# Altium PCB esp_slavev2.PcbDoc
Units mm, origin at the board's own origin, x right, y up, seen from the top; angles counter-clockwise.
Board outline 85.85 x 58.8 mm, 2 copper layers (Top Layer, Bottom Layer); 22 components, 17 nets, 84 pads, 0 vias.
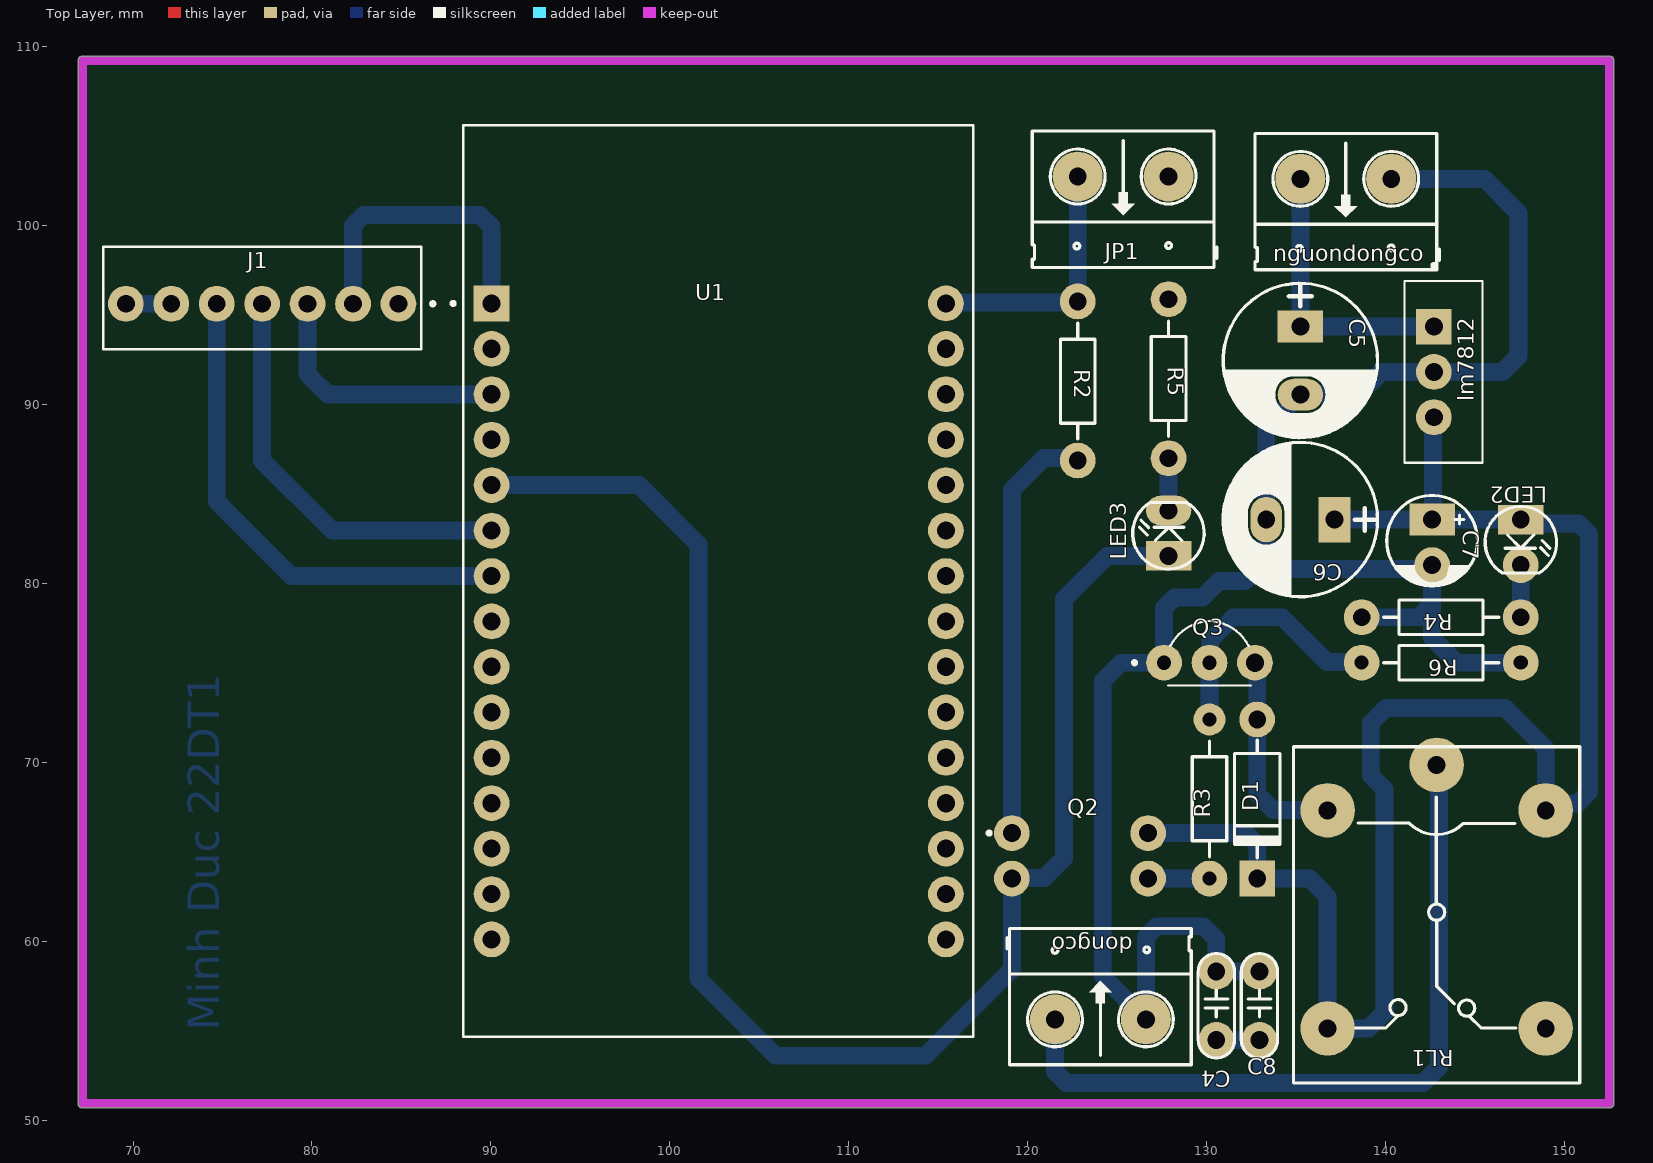
[diagram p0: Top Layer view]
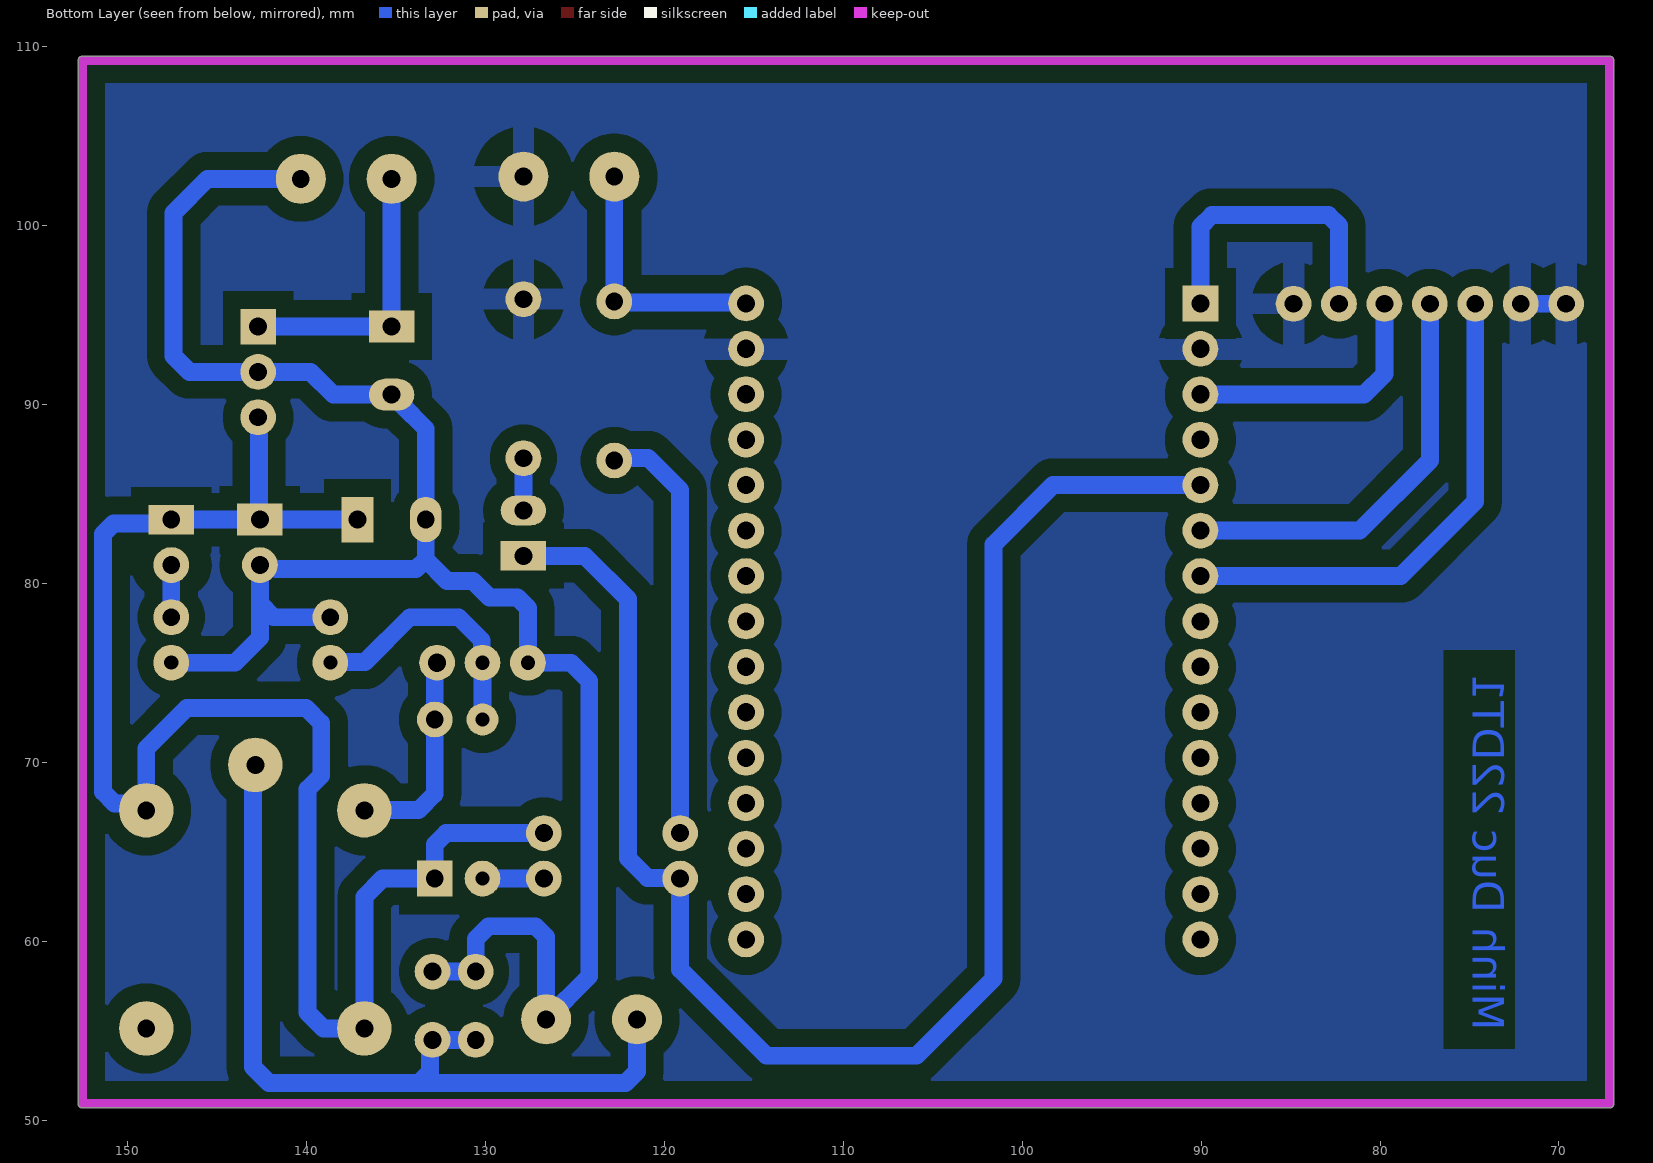
[diagram p1: Bottom Layer view, seen from below]
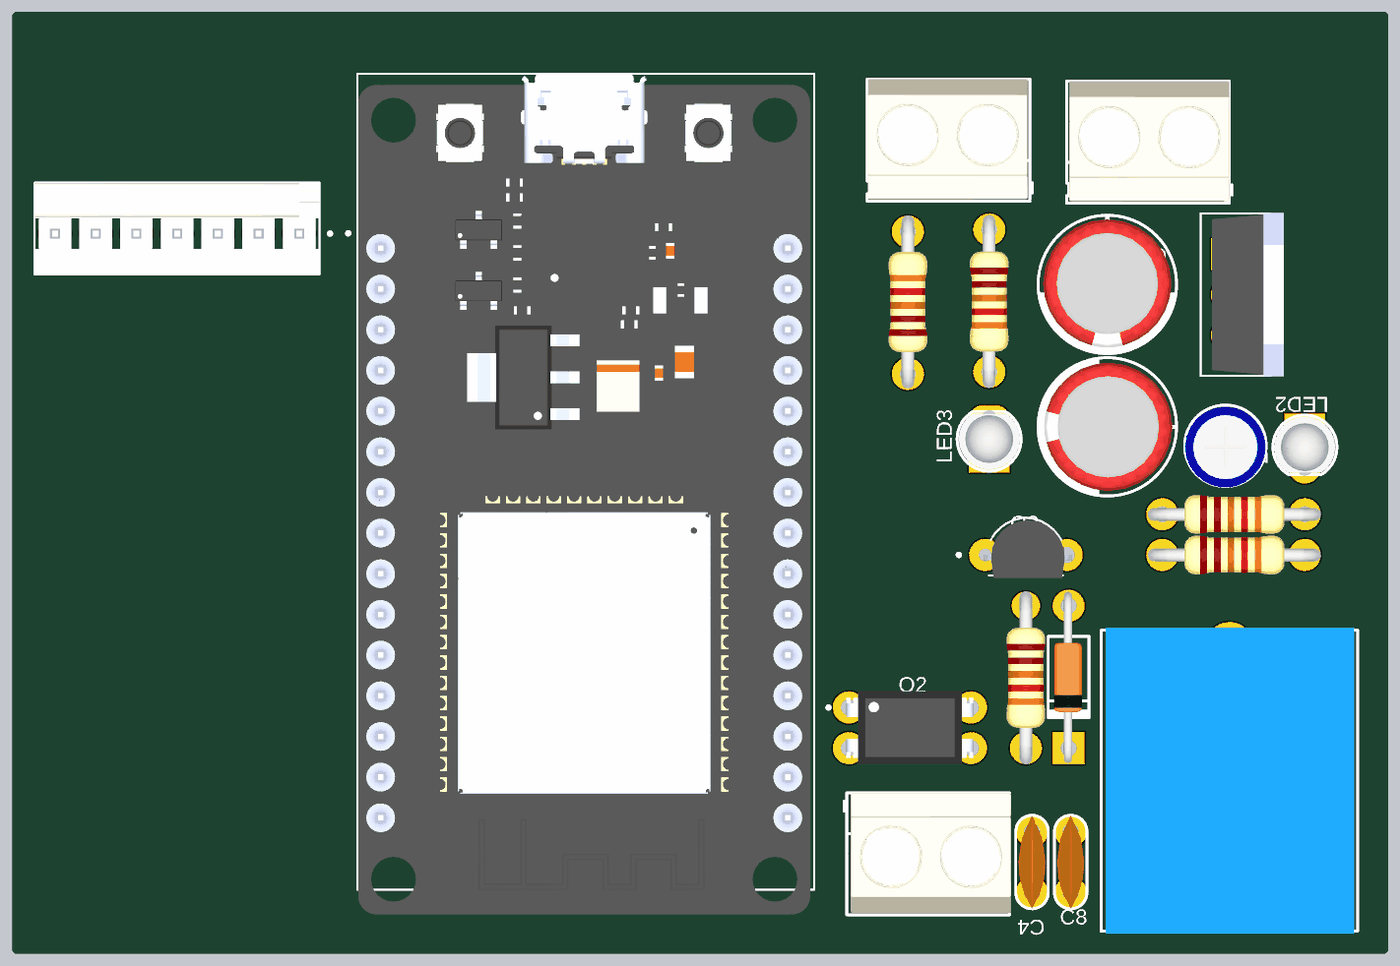
[diagram p2: 3D render of the assembled board from above, using the file's embedded part models]

## Layer stack, top to bottom
Top Solder: solder mask 0.0102, Solder Resist, Dk 3.5
Top Layer: signal copper 0.0356
Dielectric 1: dielectric 0.32, FR-4, Dk 4.8
Bottom Layer: signal copper 0.0356
Bottom Solder: solder mask 0.0102, Solder Resist, Dk 3.5

## Board outline
66.929,50.927 ccw(c67.183,50.927) 67.183,50.673 152.527,50.673 ccw(c152.527,50.927) 152.781,50.927 152.781,109.22 ccw(c152.527,109.22) 152.527,109.474 67.183,109.474 ccw(c67.183,109.22) 66.929,109.22

## Design rules (kind name [scope] priority, off if disabled: settings)
Clearance [All] p1: gap=1 ignorepadtopadclearanceinfootprint=FALSE
PlaneConnect [All] p1: planeconnectstyle=Relief reliefexpansion=0.508 reliefentries=4 reliefconductorwidth=0.3 reliefairgap=0.4
PolygonConnect [All] p1: connectstyle=Relief reliefconductorwidth=1.2 reliefentries=4 polygonreliefangle="90 Angle" airgapwidth=1.4
RoutingVias [All] p1: holewidth=0.711 width=1.27 viastyle="Through Hole" minholewidth=0.711 minwidth=1.27 maxholewidth=0.711 maxwidth=1.27
SolderMaskExpansion [All] p1: expansion=0.102 istentingtop=FALSE
Width [All] p1: maxlimit=1 minlimit=1 preferedwidth=1
29 further rules are at their usual default settings.

## Components (designator, comment, footprint, x,y, rotation, side; value= is the part's Value field where it differs from the comment)
C4 "103" CN1.5 130.556,58.293 r270 top value=0.01uF
C5 "100uF/35V" CP1.5/3.4 135.255,94.361 r270 top value=100uF/35V/50V
C6 "100uF/35V" CP1.5/3.4 137.16,83.566 r180 top value=100uF/35V/50V
C7 "10uF" CP1/2 142.621,83.566 r270 top value=10uF/50V
C8 "103" CN1.5 132.969,58.293 r270 top value=0.01uF
D1 "1N4007" D1A 132.842,72.39 r90 top
dongco "Header 2_1" HED2 121.539,55.626 r0 top value="Header 2"
J1 "640456-7" TE_640456-7 84.836,95.631 r0 top
JP1 "Header 2_1" HED2 127.889,102.743 r180 top value="Header 2"
LED2 "LED" LED-3#1 147.574,83.566 r270 top value="LED 3 ly Single Colour"
LED3 "LED" LED-3#2 127.889,81.534 r90 top value="LED 3 ly Single Colour"
lm7812 "LM7812CT" TO253P1057X470X2040-3 143.256,91.821 r270 top
nguondongco "Header 2_1" HED2 140.335,102.616 r180 top value="Header 2"
Q2 "PC817-B" DIP762W50P254L650H455Q4B 122.936,64.77 r0 top
Q3 "2N2222A" TO92254P470H750-3 130.175,77.895 r0 top
R2 "Res1" R1/4W#1 122.809,95.758 r270 top value=2k2
R3 "Res1" R1/4W#2 130.175,63.5 r90 top value=3k3
R4 "Res1" R1/4W#1 147.574,78.105 r180 top value=330
R5 "Res1" R1/4W#1 127.889,86.995 r90 top value=330
R6 "Res1" R1/4W#3 147.574,75.565 r180 top value=10k
RL1 "Relay 10A/12V" RL_SPDT_10A 142.875,69.85 r270 top value="Relay SPDT, 10A, 12V"
U1 "ESP32-DEVKIT-V1" MODULE_ESP32_DEVKIT_V1 102.743,80.137 r0 top

## Footprints (in the part's own frame and the unit in brackets; to place one, negate y for a bottom-side part, rotate by r counter-clockwise, add the part's x,y. Pads: shape width x height; smd on the part's side, far side on the other; paste and mask are expansions set on the pad)
CN1.5 [mm]
  round 2 hole 1: 1(0,0) 2(3.81,0)
  silkscreen extent -1.01,-1.02 4.82,1.02, body extent -1.01,-0.85 4.83,0.85, height 5.97
CP1.5/3.4 [mm] "Tu hoa 220->470uF,16V, 470uF/16V,25V"
  rect 1.778x2.54 hole 1: 1(0,0)
  oval 1.778x2.54 hole 1: 2(3.81,0)
  silkscreen extent -2.41,-4.32 6.22,4.32, body extent -2.16,-4 5.84,4, height 11.33
CP1/2 [mm] "Tu hoa < 22uF/16>50V"
  rect 1.778x2.54 hole 1: 1(0,0)
  round 2 hole 1: 2(2.54,0)
  silkscreen extent -1.35,-2.54 3.72,2.54, body extent -1.26,-2.53 3.8,2.53, height 7.29
D1A [mm] "Diode 1A, W 100mil, L 350mil"
  round 2 hole 1: 1(0,0)
  rect 2x2 hole 1: 2(-8.89,0)
  silkscreen extent -7.75,-1.27 -1.14,1.27, body extent -9.82,-0.84 0.88,0.91, height 2.15
DIP762W50P254L650H455Q4B [mm]
  round 2 hole 1: 1(-3.81,1.27) 2(-3.81,-1.27) 3(3.81,-1.27) 4(3.81,1.27)
  silkscreen extent -5.18,1.17 -4.98,1.37, body extent -3.96,-2.29 3.96,2.29, height 4.8
HED2 [mil] "Header 2, 2 pin, hight 300mil, Pin to Pin 200, Colour Green"
  round 110 hole 39.37: 1(0,0) 2(200,0)
  silkscreen extent -106,-100 300,200, body extent -90,-95 304,200, height 394
LED-3#1 [mm] "LED 2 PIN, 3ly Only colour"
  rect 1.651x2.54 hole 1: 1(0,0)
  round 2 hole 1: 2(2.54,0)
  silkscreen extent -0.73,-1.99 3,2.01, body extent -0.63,-1.9 2.87,1.9, height 5.52
LED-3#2 [mm] "LED 2 PIN, 3ly Only colour"
  rect 1.651x2.54 hole 1: 1(0,0)
  oval 1.651x2.54 hole 1: 2(2.54,0)
  silkscreen extent -0.73,-1.99 3,2.01, body extent -0.63,-1.9 2.87,1.9, height 5.52
MODULE_ESP32_DEVKIT_V1 [mm]
  rect 2x2 / inner round 2 / far side rect 2x2 hole 1.02: 1(-12.7,15.515)
  round 2 hole 1.02: 2(-12.7,12.975) 3(-12.7,10.435) 4(-12.7,7.895) 5(-12.7,5.355) 6(-12.7,2.815) 7(-12.7,0.275) 8(-12.7,-2.265) 9(-12.7,-4.805) 10(-12.7,-7.345) 11(-12.7,-9.885) 12(-12.7,-12.425) 13(-12.7,-14.965) 14(-12.7,-17.505) 15(-12.7,-20.045) 16(12.7,-20.045) 17(12.7,-17.505) 18(12.7,-14.965) 19(12.7,-12.425) 20(12.7,-9.885) 21(12.7,-7.345) 22(12.7,-4.805) 23(12.7,-2.265) 24(12.7,0.275) 25(12.7,2.815) 26(12.7,5.355) 27(12.7,7.895) 28(12.7,10.435) 29(12.7,12.975) 30(12.7,15.515)
  silkscreen extent -14.95,-25.48 14.23,25.48, body extent -14.23,-27.02 13.97,25.43, height 7.05
R1/4W#1 [mm] "R 1/4W, 2 Pin, 350mil"
  round 2 hole 1: 1(0,0) 2(8.89,0)
  silkscreen extent 1.22,-0.97 7.67,0.97, body extent -1.01,-1.19 9.79,1.21, height 2.83
R1/4W#2 [mm] "R 1/4W, 2 Pin, 350mil"
  round 2 hole 0.787: 1(0,0)
  round 1.778 hole 0.787: 2(8.89,0)
  silkscreen extent 1.22,-0.97 7.67,0.97, body extent -1.01,-1.19 9.79,1.21, height 2.83
R1/4W#3 [mm] "R 1/4W, 2 Pin, 350mil"
  round 2 hole 0.787: 1(0,0) 2(8.89,0)
  silkscreen extent 1.22,-0.97 7.67,0.97, body extent -1.01,-1.19 9.79,1.21, height 2.83
RL_SPDT_10A [mil] "Relay SPDT, 5 pin, 10A,W 650mil, L 800mil, H 800mil"
  round 120 hole 39.37: 1(0,0) 2(580,240) 3(580,-240) 4(100,-240) 5(100,240)
  silkscreen extent -40,-315 700,315, body extent -46,-304 706,306, height 602
TE_640456-7 [mm]
  round 2 hole 1: 1(0,0) 2(-2.54,0) 3(-5.08,0) 4(-7.62,0) 5(-10.16,0) 6(-12.7,0) 7(-15.24,0)
  silkscreen extent -16.51,-2.54 2.02,3.18, body extent -16.51,-2.54 1.27,3.17, height 10.03
TO253P1057X470X2040-3 [mm]
  rect 1.98x1.98 / inner round 1.98 / far side rect 1.98x1.98 hole 1: 1(-2.535,-0.54)
  round 2 hole 1: 2(0,-0.54) 3(2.535,-0.54)
  silkscreen extent -6.04,-2.17 5.08,2.17, body extent -5.1,-1.49 5.1,3.01, height 19.22
TO92254P470H750-3 [mm]
  round 2 hole 0.8: 1(-2.54,-2.33) 2(0,-2.33)
  round 2 hole 1.02: 3(2.54,-2.33)
  silkscreen extent -4.29,-3.6 2.3,0, body extent -2.61,-3.77 2.87,-0.17, height 8.09

## Part data
C4 C8: library part CN1.5, "Cap np 682pF => 104pF"
C5 C6: library part CP3, "Cap 100uF/35V - 470uF/16V", Description 1="1000uF/6,3V - 470uF/16V - 330uF - 25V", Description 2="220uF/35V - 100uF/50V - 63V - 4,7uF/200V", Description 3="22uF => 33uF100V - 3,3uF => 4,7uF/250V", Description 4="2,2uF =>3,3uF/350 - 2,2uF/400V - 1uF/450V"
C7: library part CP1, "Cap P  0,1uF < 22uF , 16 - 50V", Description 1="10 => 220uF/6,3V/10V - 10uF => 100uF/16V", Description 2="0,1uF => 33uF/50V - 10uF => 22uF/63V", Description 3="0,47uF => 10uF/100V"
D1: library part D1A, "Diode 1A"
dongco JP1 nguondongco: "Header, 2-Pin", Manufacturer="Generic Components", Class=Connector
J1: "Header Friction Lock MTA-100 7 250 VAC Polyester Tin Copper Alloy Tin", Package=None, Check_prices=https://www.snapeda.com/parts/640456-7/TE+Connectivity+AMP+Connectors/view-part/?ref=eda, MF="TE Connectivity", MP=640456-7, SnapEDA_Link=https://www.snapeda.com/parts/640456-7/TE+Connectivity+AMP+Connectors/view-part/?ref=snap
LED2 LED3: "LED Single colour Green and Red"
lm7812: "Linear Voltage Regulator IC Positive Fixed 1 Output 1A TO-220-3", Package="TO-220-3 ON", Check_prices=https://www.snapeda.com/parts/LM7812CT/Onsemi/view-part/?ref=eda, MF="ON Semiconductor", MP=LM7812CT, SnapEDA_Link=https://www.snapeda.com/parts/LM7812CT/Onsemi/view-part/?ref=snap
Q2: "Phototransistors 4-DIP (0.300, 7.62mm)", Package="DIP-4 American Bright", Check_prices=https://www.snapeda.com/parts/PC817-B/American+Bright/view-part/?ref=eda, MF="American Bright", MP=PC817-B, SnapEDA_Link=https://www.snapeda.com/parts/PC817-B/American+Bright/view-part/?ref=snap
Q3: "BJT, TO-92, 40V, 600mA, NPN, 0.625W, 150Â°C", Package="TO-92 Diotec", Check_prices=https://www.snapeda.com/parts/2N2222A/Diotec/view-part/?ref=eda, MF="Diotec Semiconductor", MP=2N2222A, SnapEDA_Link=https://www.snapeda.com/parts/2N2222A/Diotec/view-part/?ref=snap
R2 R3 R4 R5 R6: library part Res1_4, "Resistor", Manufacturer="Generic Components", Class=Passive, Published=08/06/2000, Publisher="Altium Hobart Technology Centre", SubClass=Resistor
RL1: library part "Relay 1", "Relay SPDT,10A - 12VDC 5 Pin"
U1: "Dual core, Wi-Fi: 2.4 GHz up to 150 Mbits/s,BLE (Bluetooth Low Energy) and legacy Bluetooth, 32 bits, Up to 240 MHz", Package=None, Check_prices=https://www.snapeda.com/parts/ESP32-DEVKIT-V1/Do+it/view-part/?ref=eda, MF="Do it", MP=ESP32-DEVKIT-V1, SnapEDA_Link=https://www.snapeda.com/parts/ESP32-DEVKIT-V1/Do+it/view-part/?ref=snap

## Nets (pads, with @x,y where several pads share a name; then routed paths per layer and width w, separated by ;. In a path a pad name is that pad's centre, name@x,y a point inside that pad or via, vN(x,y) a via of type N, cw(c..) or ccw(c..) an arc to the next point about the centre after c; other vN are vias at no path point)
5v: JP1.2 R2.1 U1.30 | length 14.4
  Bottom Layer w1: U1.30 115.496,95.705 122.756,95.705 R2.1 JP1.2
12v: C6.1 C7.1 D1.2 LED2.1 lm7812.3 Q2.4 RL1.3 RL1.5 | length 92.1
  Bottom Layer w1: Q2.4 132.207,66.04 132.842,65.405 D1.2 135.763,63.5 136.779,62.484 RL1.3 139.065,55.118 139.954,56.007 139.954,68.494 139.192,69.256 139.192,72.185 140.032,73.025 146.708,73.025 148.971,70.762 148.971,67.702 RL1.5 149.363,67.702 150.741,67.702 151.384,68.345 151.384,82.766 150.798,83.352 147.788,83.352 LED2.1 C7.1 ; C6.1 C7.1 ; lm7812.3 142.669,89.239 142.669,83.614 C7.1
am: C4.1 C5.2 C6.2 C7.2 C8.1 dongco.2 lm7812.2 nguondongco.1 Q3.1 R4.2 R6.1 | length 108.9
  Bottom Layer w1: C8.1 C4.1 130.556,60.12 129.843,60.833 127.205,60.833 126.619,60.247 dongco.2 124.206,58.039 124.206,74.549 125.222,75.565 Q3.1 127.635,78.623 128.221,79.208 129.78,79.208 130.709,80.137 132.152,80.137 133.35,81.335 ; C5.2@134.725,90.021 133.35,88.646 C6.2 133.35,81.335 ; C5.2 138.517,90.551 139.787,91.821 lm7812.2 146.558,91.821 147.447,92.71 147.447,100.711 145.542,102.616 nguondongco.1 nguondongco.1@140.113,102.616 ; R4.2 141.859,78.105 142.621,78.867 ; R6.1 144.018,75.565 142.621,76.962 142.621,78.867 ; 133.35,81.335 133.889,80.796 141.684,80.796 141.723,80.835 142.43,80.835 C7.2 142.621,78.867
AUX: J1.3 U1.3 | length 14.7
  Bottom Layer w1: J1.3 79.756,91.694 80.899,90.551 90.022,90.551 U1.3
GND: J1.1 J1.6 J1.7 JP1.1 R5.2 U1.2 U1.29 | length 2.5
  Bottom Layer w1: J1.7 J1.6
NetC4_2: C4.2 C8.2 dongco.1 RL1.1 | length 47.4
  Bottom Layer w1: dongco.1@121.285,55.499 dongco.1@121.412,55.499 ; dongco.1@121.436,55.856 dongco.1@121.539,55.753 ; dongco.1 121.539,52.705 122.174,52.07 133.731,52.07 ; C4.2 C8.2 133.118,54.334 133.118,52.683 133.731,52.07 ; RL1.1 143.002,69.723 143.002,52.959 142.113,52.07 133.731,52.07
NetD1_1: D1.1 Q3.3 RL1.4 | length 11.7
  Bottom Layer w1: Q3.3 132.842,75.438 D1.1 132.842,68.233 133.755,67.32 136.769,67.32 RL1.4
NetJ1_2: J1.2 U1.1 | length 16.9
  Bottom Layer w1: J1.2 82.296,99.998 82.882,100.584 89.408,100.584 90.043,99.949 U1.1
NetJ1_4: J1.4 U1.6 | length 23.2
  Bottom Layer w1: J1.4 77.216,86.868 81.132,82.952 U1.6
NetJ1_5: J1.5 U1.7 | length 28.1
  Bottom Layer w1: J1.5 74.676,84.582 78.846,80.412 U1.7
NetLED2_2: LED2.2 R4.1 | length 2.9
  Bottom Layer w1: R4.1 LED2.2
NetLED3_2: LED3.2 R5.1 | length 2.9
  Bottom Layer w1: LED3.2 R5.1
NetQ2_1: Q2.1 R2.2 | length 23.7
  Bottom Layer w1: Q2.1 119.126,85.217 120.926,87.017 122.66,87.017 R2.2
NetQ2_3: Q2.3 R3.1 | length 3.4
  Bottom Layer w1: Q2.3 R3.1
NetQ3_2: Q3.2 R3.2 R6.2 | length 14.5
  Bottom Layer w1: R3.2 Q3.2 130.215,75.605 130.215,76.815 131.505,78.105 134.239,78.105 136.748,75.596 138.653,75.596 R6.2
role: LED3.1 Q2.2 U1.5 | length 88.3
  Bottom Layer w1: U1.5 98.277,85.492 101.6,82.169 101.6,57.912 105.918,53.594 114.3,53.594 119.126,58.42 Q2.2 119.166,63.54 120.953,63.54 122.047,64.634 122.047,79.121 124.46,81.534 LED3.1
vin: C5.1 lm7812.1 nguondongco.2 | length 15.7
  Bottom Layer w1: nguondongco.2 C5.1 135.258,94.358 142.714,94.358 lm7812.1
pads on no net: RL1.2 U1.4 U1.8 U1.9 U1.10 U1.11 U1.12 U1.13 U1.14 U1.15 U1.16 U1.17 U1.18 U1.19 U1.20 U1.21 U1.22 U1.23 U1.24 U1.25 U1.26 U1.27 U1.28

## Polygon pours and split planes (outlines as drawn)
GND on Bottom Layer "GND" (solid, pour order 0): 67.183,109.347 67.31,109.22 152.527,109.22 152.527,50.927 152.4,51.054 67.183,51.054

## Keep-outs
Keep-Out Layer:
  lines w0.508: 67.183,50.927 152.527,50.927 152.527,109.22 67.183,109.22 67.183,50.927

## Other copper
Bottom Layer:
  text "Minh Duc 22DT1" at 75.407,54.991 h3 r90